# Altium PCB PCB2.PcbDoc (part 2 of 2)
Units mm, origin at the board's own origin, x right, y up, seen from the top; angles counter-clockwise.
Board outline 85.12 x 55.68 mm, 2 copper layers (Top Layer, Bottom Layer), stack 1.569 mm thick; 61 components, 48 nets, 258 pads, 369 vias.
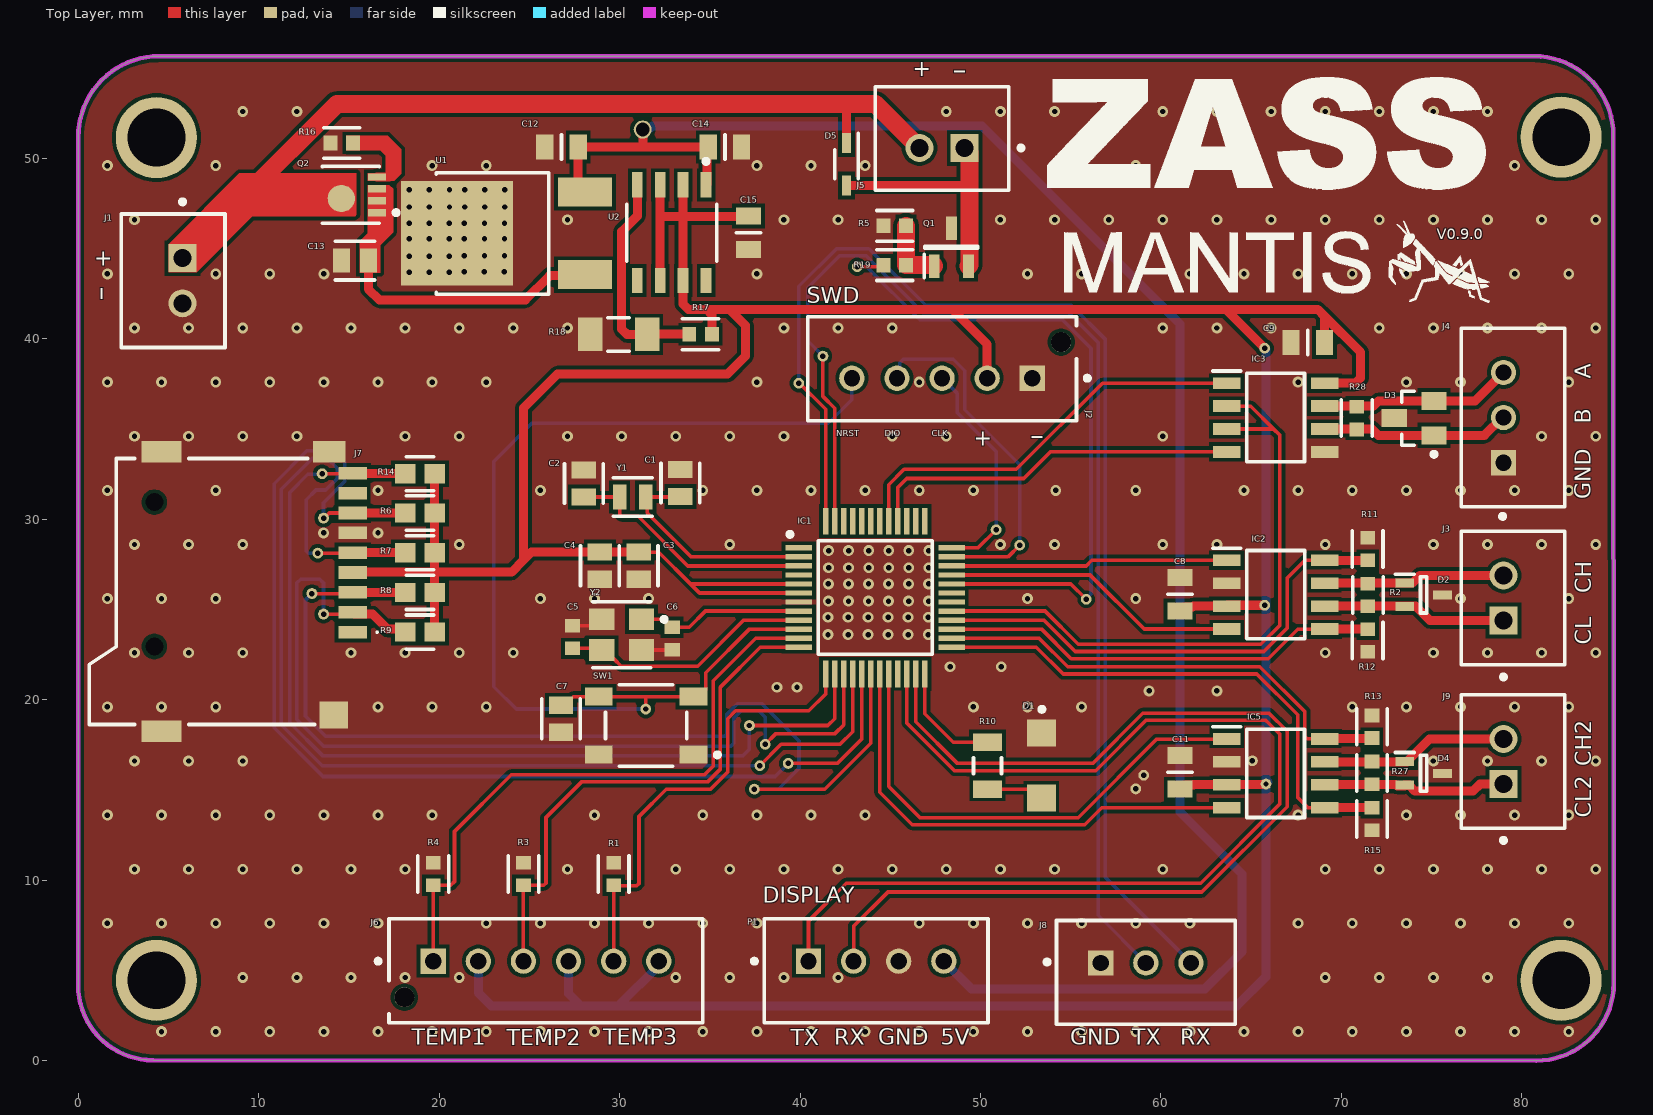
[diagram p0: Top Layer view]

## Via types
v1: diameter 0.6, hole 0.3, Top Layer to Bottom Layer, tented both sides, 369 vias

## Nets (pads, with @x,y where several pads share a name; then routed paths per layer and width w, separated by ;. In a path a pad name is that pad's centre, name@x,y a point inside that pad or via, vN(x,y) a via of type N, cw(c..) or ccw(c..) an arc to the next point about the centre after c; other vN are vias at no path point) (continued)
VDD: (continued)
  Top Layer w0.5: J7.4@15.226,27.07 19.741,27.07 ; R9.2 R8.2 19.741,27.07 ; R14.2@19.741,32.543 R6.2 R7.2 19.741,27.07 ; C3.2 C4.2 25.105,28.173 24.659,27.728 ; U2.6 32.241,46.78 ; U2.3 32.241,46.78 ; U2.2 33.511,46.78 ; R17.2@35.108,40.281 35.108,41.339 34.815,41.632 ; C15.1 37.108,46.78 33.511,46.78 ; J2.2 50.365,39.696 48.429,41.632 ; C11.1 61.277,15.277 61.79,15.277 61.795,15.282 63.88,15.282 65.753,15.282 65.793,15.322 pad.11@65.82,15.322 ; C8.1 61.277,25.142 61.754,25.142 61.795,25.183 IC2.3 63.694,25.232 pad.11@65.744,25.232 ; pad.11@65.744,39.48 63.592,41.632 ; C9.1 69.063,41.25 ; IC3.8 70.769,37.54 71.062,37.833 71.062,39.251 69.063,41.25 ; 19.741,27.07 24.002,27.07 24.659,27.728 ; 24.659,27.728 24.659,36.159 26.54,38.04 35.96,38.04 36.96,39.04 36.96,40.74 36.068,41.632 ; 32.241,46.78 33.511,46.78 ; 33.511,46.78 U2.7 33.511,41.925 33.804,41.632 34.815,41.632 ; 34.815,41.632 36.068,41.632 ; 36.068,41.632 48.429,41.632 ; 48.429,41.632 63.592,41.632 ; 63.592,41.632 68.681,41.632 69.063,41.25
  Bottom Layer w0.5: J6.2 22.159,3.741 22.88,3.02 27.846,3.02 ; J6.4 27.159,3.707 27.846,3.02 ; J6.6 32.159,5.256 29.923,3.02 ; pad.11@65.82,15.322 65.82,4.63 64.21,3.02 29.923,3.02 ; pad.11@65.82,39.404 65.82,25.232 65.82,15.543 pad.11@65.93,15.433 ; 27.846,3.02 29.923,3.02
pads on no net: IC1.1 IC1.4 IC1.21 IC1.30 IC1.31 IC1.37 IC1.38 IC1.39 IC1.42 IC1.43 IC1.44 IC1.45 IC1.46 J2. J6. J7.1 J7.8 J7.MH1 J7.MH2 U2.5 U2.8

## Polygon pours and split planes (outlines as drawn)
GND on Bottom Layer "Top Layer-GND" (solid, pour order 1): 4.133,0.011 cw(c4.133,4.163) -0.02,4.163 -0.017,51.184 cw(c4.464,51.184) 4.464,55.665 80.681,55.665 cw(c80.681,51.269) 85.077,51.269 85.099,4.284 cw(c80.805,4.284) 80.805,-0.011
GND on Top Layer "Top Layer-GND" (solid, pour order 0): 4.133,0.011 cw(c4.133,4.163) -0.02,4.163 -0.017,51.184 cw(c4.464,51.184) 4.464,55.665 80.681,55.665 cw(c80.681,51.269) 85.077,51.269 85.099,4.284 cw(c80.805,4.284) 80.805,-0.011

## Keep-outs
Keep-Out Layer:
  the board outline again, w0.254

## Other copper
Top Layer:
  region net NetQ2_4: 14.838,50.446 14.838,51.258 17.137,51.258 17.88,50.515 17.88,49.142 17.508,48.77 16.04,48.77 16.04,49.176 17.03,49.176 17.03,50.136 16.721,50.446 15.596,50.446
  region net INPUT: 4.99,43.695 4.99,45.245 8.921,49.176 15.405,49.176 15.405,46.865 15.328,46.789 9.634,46.789 6.54,43.695
  region net NetC13_2: 16.04,48.516 16.04,45.856 15.596,45.412 15.596,43.662 16.721,43.662 16.721,45.187 17.43,45.897 17.43,48.313 17.227,48.516 17.03,48.516

## Silkscreen, mask and mechanical layers (free items; w line width, h text height)
Top Overlay:
  drawing of 19 lines, arcs and shapes, not listed
  text "ı" at 49.42,54.64 h1.52 r90
  text "+" at 46.247,54.237 h1.52
  text "V0.9.0" at 75.281,45.331 h1
  text "+" at 0.88,43.742 h1.52
  text "ı" at 1.106,41.929 h1.52
  text "SWD" at 40.36,41.657 h1.52
  text "A" at 84.135,37.8 h1.52 r90
  text "B" at 84.135,35.3 h1.52 r90
  text "+" at 50.64,35.158 h1.52 r180
  text "ı" at 52.56,34.72 h1.52 r270
  text "CLK" at 47.287,34.472 h0.6
  text "NRST" at 42.011,34.454 h0.6
  text "DIO" at 44.695,34.454 h0.6
  text "GND" at 84.135,31.12 h1.52 r90
  text "CH" at 84.142,25.902 h1.52 r90
  text "CL" at 84.156,23.042 h1.52 r90
  text "CH2" at 84.141,16.314 h1.52 r90
  text "CL2" at 84.155,13.454 h1.52 r90
  text "DISPLAY" at 37.92,8.437 h1.52
  text "TEMP3" at 29.096,0.575 h1.52
  text "GND" at 44.34,0.577 h1.52
  text "5V" at 47.781,0.577 h1.52
  text "TEMP1" at 18.48,0.558 h1.52
  text "RX" at 41.9,0.56 h1.52
  text "GND" at 54.96,0.557 h1.52
  text "TX" at 58.4,0.559 h1.52
  text "RX" at 61.071,0.559 h1.52
  text "TEMP2" at 23.736,0.538 h1.52
  text "TX" at 39.475,0.54 h1.52
Bottom Overlay:
  drawing of 19 lines, arcs and shapes, not listed
  text "V0.9.0" at 57.199,45.351 h1